# EAGLE board Tesseract_BLDC_Routed (EAGLE 7.7.0)
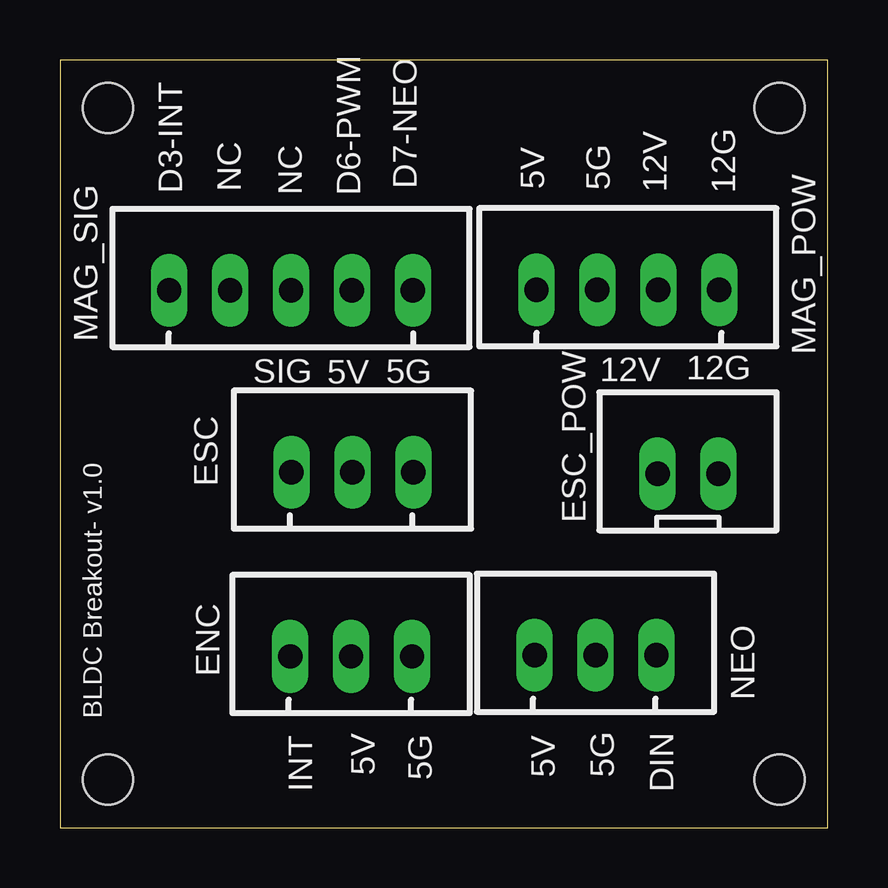
[diagram p0: board, top side]
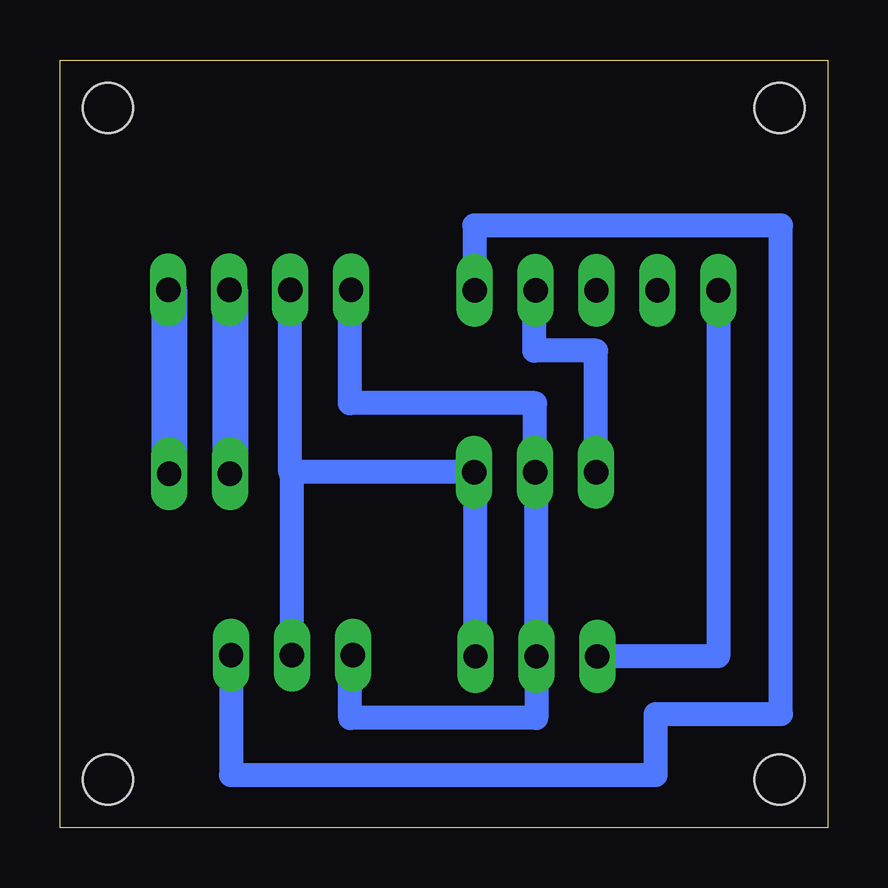
[diagram p1: board, bottom side, seen from below]

Size 32 x 32 mm. Coordinates in mm from the lower left corner, seen from the top.
Outline: 0,0 32,0 32,32 0,32 0,0
Copper layers (1*16): Top 0.035mm / dielectric 1.5mm / Bottom 0.035mm
Design rules "default": minimum track width 10mil, minimum drill 24mil, track to track 8mil, track to pad 8mil, pad to pad 8mil, via to via 8mil, smd to smd 8mil, copper to edge 40mil, drill to drill 8mil, minimum pad ring 10mil, minimum via ring 8mil, stop-mask expansion 4mil, vias tented up to drill 0mil, thermal gap 10mil
Holes 2.1 mm at 30,2 2,2 30,30 2,30

## Footprints (pad centres in the part's own frame; a part is rotated, then mirrored left to right if it is on the bottom)
JST-XH-03-PACKAGE-LONG-PAD = drill 1.016 long: 1 -2.54,0; 2 0,0; 3 2.54,0
JST-XH-02-PACKAGE-LONG-PAD = drill 1.016 long: 1 -1.27,0; 2 1.27,0
JST-XH-04-PACKAGE-LONG-PAD = drill 1.016 long: 1 -3.81,0; 2 -1.27,0; 3 1.27,0; 4 3.81,0
JST-XH-05-PACKAGE-LONG-PAD = drill 1.016 long: 1 -5.08,0; 2 -2.54,0; 3 0,0; 4 2.54,0; 5 5.08,0

## Placement (x,y rotation side)
ENC  [JST-XH-03-PACKAGE-LONG-PAD]  12.14,7.14 0 top
ESC  [JST-XH-03-PACKAGE-LONG-PAD]  12.19,14.82 0 top
ESC_POW  [JST-XH-02-PACKAGE-LONG-PAD]  26.18,14.74 0 top
MAG_POW  [JST-XH-04-PACKAGE-LONG-PAD]  23.67,22.42 0 top
MAG_SIG  [JST-XH-05-PACKAGE-LONG-PAD]  9.63,22.4 0 top
NEO  [JST-XH-03-PACKAGE-LONG-PAD]  22.33,7.18 0 top
U$15  [12X12]  16,30 0 top

## Library data of the parts
ENC ESC ESC_POW MAG_POW MAG_SIG NEO = Rembrandt Electronics - JST XH Connectors v1-0
U$15 = pinhead_1x14_no_frame MOD

## Nets
5V_GND: ENC.3 ESC.3 MAG_POW.2 NEO.2
5V_VCC: ENC.2 ESC.2 MAG_POW.1 NEO.1
12V_GND: ESC_POW.2 MAG_POW.4
12V_VCC: ESC_POW.1 MAG_POW.3
PIN3: ENC.1 MAG_SIG.1
PIN6: ESC.1 MAG_SIG.4
PIN7: MAG_SIG.5 NEO.3

## Tracks (layer width: path | path; a pad name or v marks a point on that pad's centre or on a via)
5V_GND
  Bottom 0.406: 14.68,14.82 ESC.3 | 22.33,14.82 22.4,14.82
  Bottom 1: ESC.3 22.33,14.82 NEO.2 | 22.4,14.82 MAG_POW.2 | ENC.3 14.68,14.82
5V_VCC
  Bottom 0.406: 12.14,14.82 ESC.2 | 19.9,7.18 NEO.1
  Bottom 1: 12.14,14.82 ENC.2 12.14,4.57 19.9,4.57 19.9,7.18 | ESC.2 12.19,17.7 19.91,17.7 19.91,22.42 MAG_POW.1
12V_GND
  Bottom 0.406: MAG_POW.4 27.45,22.42
  Bottom 1.5: 27.45,22.42 ESC_POW.2
12V_VCC
  Bottom 0.406: MAG_POW.3 24.91,22.42
  Bottom 1.5: 24.91,22.42 ESC_POW.1
PIN3
  Bottom 1: MAG_SIG.1 4.55,7.14 ENC.1
PIN6
  Bottom 0.406: 12.23,22.4 MAG_SIG.4
  Bottom 1: ESC.1 9.65,19.88 12.23,19.88 12.23,22.4
PIN7
  Bottom 0.406: 14.72,22.4 MAG_SIG.5
  Bottom 1: NEO.3 24.87,2.19 7.16,2.19 7.16,4.73 1.94,4.73 1.94,25.1 14.72,25.1 14.72,22.4

## Text on the board
tNames: NC | D7-NEO | 5V | 5G | D3-INT | NC | D6-PWM | 12V | 12G | SIG | 5V | 5G | 12V | 12G | BLDC Breakout- v1.0 | INT | 5V | 5G | 5V | 5G | DIN